# EAGLE board N_MD2 (EAGLE 9.6.2)
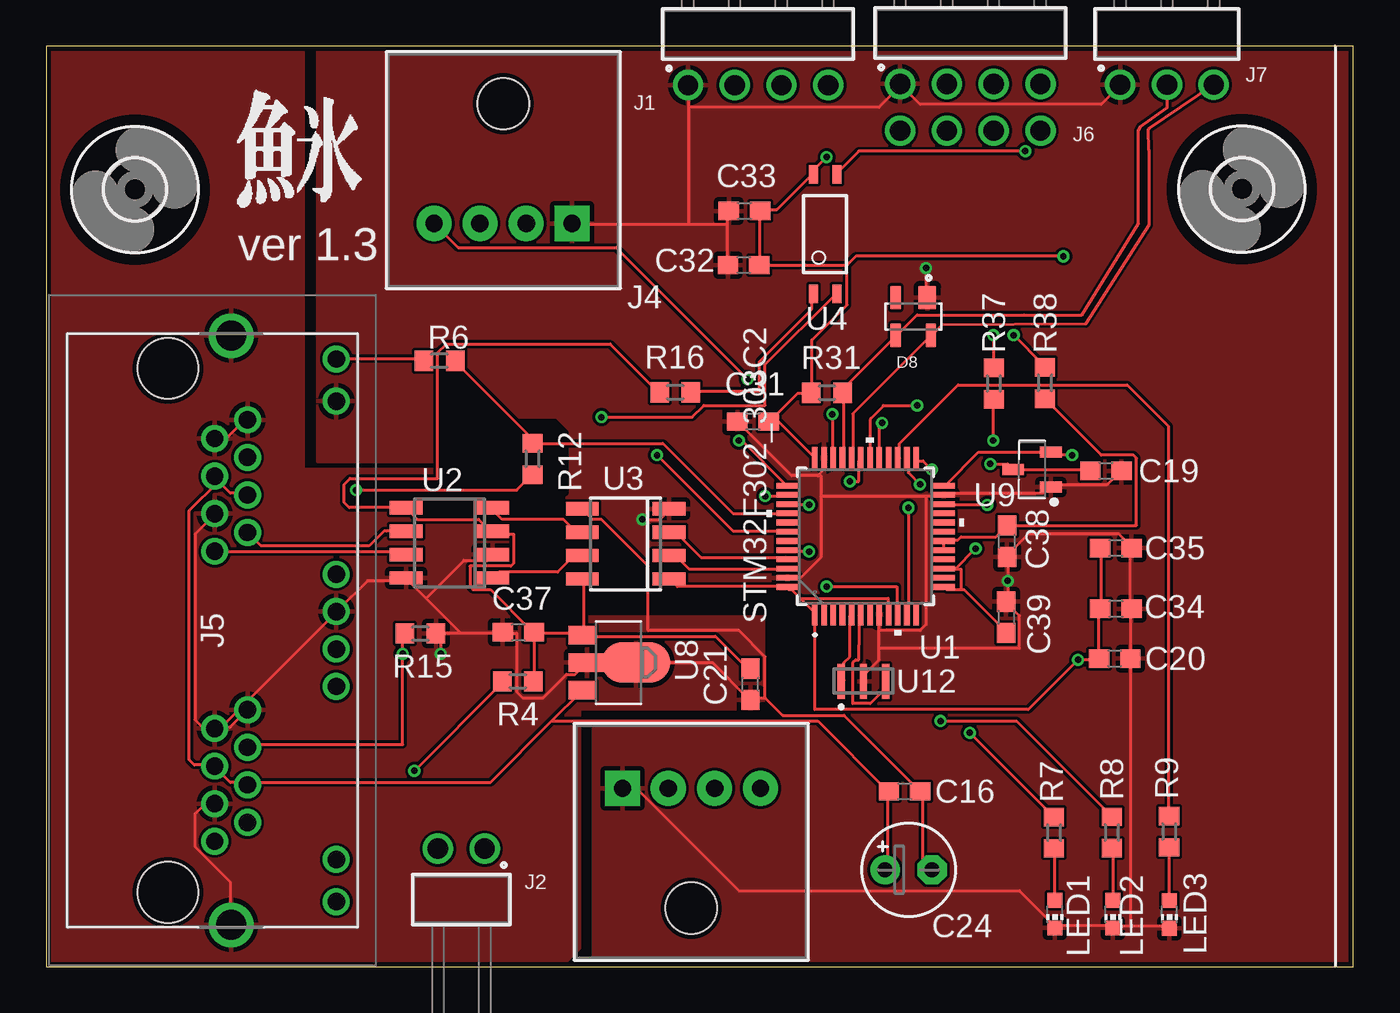
[diagram p0: board, top side]
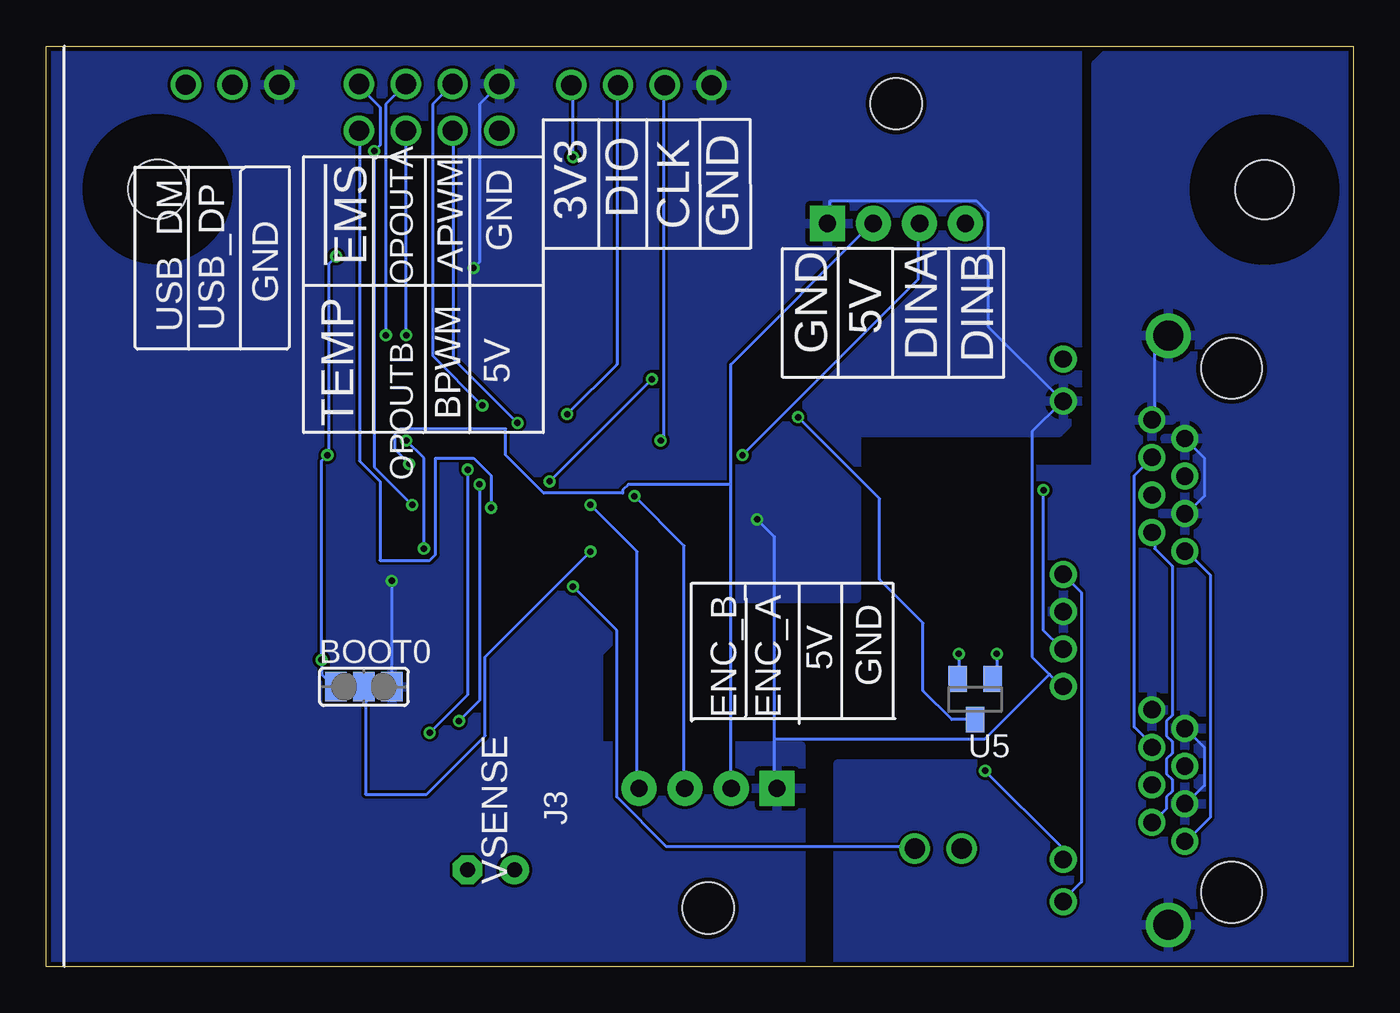
[diagram p1: board, bottom side, seen from below]

Size 71 x 50 mm. Coordinates in mm from the lower left corner, seen from the top.
Outline: 0,0 71,0 71,50 0,50 0,0
Copper layers (1*16): Top 0.035mm / dielectric 1.5mm / Bottom 0.035mm
Design rules "SeeedStudio_2layer_DRU_no_angle_20140221": minimum track width 6mil, minimum drill 12mil, track to track 6mil, track to pad 6mil, pad to pad 6mil, via to via 6mil, smd to smd 0mil, copper to edge 10mil, drill to drill 10mil, minimum pad ring 10mil, minimum via ring 6mil, stop-mask expansion 2mil, vias tented up to drill 100mil, thermal gap 10mil

## Footprints (pad centres in the part's own frame; a part is rotated, then mirrored left to right if it is on the bottom)
SJ_2 = smd 1.168 x 1.6: 1 -1.524,0; 2 0,0; 3 1.524,0
C0603 = smd 1.1 x 1: 1 -0.85,0; 2 0.85,0
E2,5-5 = drill 0.813 pad 1.6: + -1.27,0 | drill 0.813 pad 1.6 octagon: - 1.27,0
SOT143 = smd 0.99 x 1.3: 1 -0.76,-1.025 | smd 0.59 x 1.3: 2 0.96,-1.025; 3 0.96,1.025; 4 -0.96,1.025
3,2 = hole 3.2: 0,0
61300411021 = drill 1.1: 1 3.81,2.77; 2 1.27,2.77; 3 -1.27,2.77; 4 -3.81,2.77
61300211021 = drill 1.1: 1 1.27,2.77; 2 -1.27,2.77
CONN4_1744426-4 = drill 0.94 pad 1.905 square: 1 7.493,0 | drill 0.94 pad 1.905: 2 5.004,0; 3 2.489,0; 4 0,0 | hole 2.794: 3.759,6.502
RJHSE538102 = drill 0.94 pad 1.462: A1 0,0; A2 -1.02,1.78; A3 -2.04,0; A4 -3.06,1.78; A5 -4.08,0; A6 -5.1,1.78; A7 -6.12,0; A8 -7.14,1.78; A9 3.28,6.6; A10 1.25,6.6; A11 -8.15,6.6; A12 -10.44,6.6; B1 15.75,0; B2 14.73,1.78; B3 13.71,0; B4 12.69,1.78; B5 11.67,0; B6 10.65,1.78; B7 9.63,0; B8 8.61,1.78; B9 19.03,6.6; B10 16.74,6.6; B11 7.34,6.6; B12 5.31,6.6 | drill 1.62 pad 2.43: MH1 -11.705,0.89; MH2 20.295,0.89 | hole 3.3: -9.93,-2.54; 18.52,-2.54
61300821021 = drill 1.1: 1 3.81,2.77; 2 3.81,5.31; 3 1.27,2.77; 4 1.27,5.31; 5 -1.27,2.77; 6 -1.27,5.31; 7 -3.81,2.77; 8 -3.81,5.31
61300311021 = drill 1.1: 1 2.54,2.77; 2 0,2.77; 3 -2.54,2.77
CHIP-LED0603 = smd 0.8 x 0.8: A 0,-0.75; C 0,0.75
R0603 = smd 1 x 1.1: 1 -0.85,0; 2 0.85,0
LQFP48-7X7MM = smd 1.194 x 0.305: 1 -4.25,2.75; 2 -4.25,2.25; 3 -4.25,1.75; 4 -4.25,1.25; 5 -4.25,0.75; 6 -4.25,0.25; 7 -4.25,-0.25; 8 -4.25,-0.75; 9 -4.25,-1.25; 10 -4.25,-1.75; 11 -4.25,-2.25; 12 -4.25,-2.75; 25 4.25,-2.75; 26 4.25,-2.25; 27 4.25,-1.75; 28 4.25,-1.25; 29 4.25,-0.75; 30 4.25,-0.25; 31 4.25,0.25; 32 4.25,0.75; 33 4.25,1.25; 34 4.25,1.75; 35 4.25,2.25; 36 4.25,2.75 | smd 0.305 x 1.194: 13 -2.75,-4.25; 14 -2.25,-4.25; 15 -1.75,-4.25; 16 -1.25,-4.25; 17 -0.75,-4.25; 18 -0.25,-4.25; 19 0.25,-4.25; 20 0.75,-4.25; 21 1.25,-4.25; 22 1.75,-4.25; 23 2.25,-4.25; 24 2.75,-4.25; 37 2.75,4.25; 38 2.25,4.25; 39 1.75,4.25; 40 1.25,4.25; 41 0.75,4.25; 42 0.25,4.25; 43 -0.25,4.25; 44 -0.75,4.25; 45 -1.25,4.25; 46 -1.75,4.25; 47 -2.25,4.25; 48 -2.75,4.25
SO08 = smd 0.72 x 1.78: 1 -1.905,-2.35; 2 -0.635,-2.35; 3 0.635,-2.35; 4 1.905,-2.35; 5 1.905,2.35; 6 0.635,2.35; 7 -0.635,2.35; 8 -1.905,2.35
MINI-FLAT-4 = smd 1 x 0.5: 1 -3.24,0.635; 2 -3.24,-0.635; 3 3.24,-0.635; 4 3.24,0.635
SOT23 = smd 1 x 1.4: 1 -0.95,-1.1; 2 0.95,-1.1; 3 0,1.1
SOT89 = smd 1 x 1.5: 1 -1.499,-1.981; 3 1.499,-1.981 | smd 1 x 2: 2 0,-1.727 | smd 2.2 x 3.7: 2@1 0,0.94
SOT95P240X110-3 = smd 1.18 x 0.609: 1 -1.024,0.95; 2 -1.024,-0.95; 3 1.024,0
CSTNE_GH5L = smd 0.4 x 1.9: 1 -1.2,0; 2 0,0; 3 1.2,0

## Placement (x,y rotation side)
BOOT0  [SJ_2]  53.74,15.2 0 bottom
C16  100n  [C0603]  46.63,9.52 0 top
C19  1u  [C0603]  57.56,26.92 0 top
C20  1u  [C0603]  58.04,16.73 0 top
C21  100n  [C0603]  38.25,15.34 90 top
C24  47u  [E2,5-5]  46.84,5.26 0 top
C31  100n  [C0603]  38.39,29.61 0 top
C32  100n  [C0603]  37.88,38.1 0 top
C33  100n  [C0603]  37.93,41.04 0 top
C34  10n  [C0603]  58.1,19.43 180 top
C35  1u  [C0603]  58.1,22.73 180 top
C37  330n  [C0603]  25.65,18.16 180 top
C38  330p  [C0603]  52.18,23.1 90 top
C39  330p  [C0603]  52.13,18.98 270 top
D8  SP0503BAHTG  [SOT143]  47.1,35.31 180 top
H1  MOUNT-HOLE3.2  [3,2]  4.83,42.2 0 top
H2  MOUNT-HOLE3.2  [3,2]  64.94,42.23 0 top
J1  61300411021  [61300411021]  38.67,50.65 180 top
J2  61300211021  [61300211021]  22.55,3.64 0 top
J3  EP2.5-4-SIDE  [CONN4_1744426-4]  38.8,9.68 180 top
J4  EP2.5-4-SIDE  [CONN4_1744426-4]  21.07,40.37 0 top
J5  RJHSE-5381-02  [RJHSE538102]  9.16,22.56 270 top
J6  61300821021  [61300821021]  50.19,50.71 180 top
J7  61300311021  [61300311021]  60.87,50.67 180 top
LED1  RED  [CHIP-LED0603]  54.79,2.85 180 top
LED2  YELLOW  [CHIP-LED0603]  57.94,2.85 180 top
LED3  GREEN  [CHIP-LED0603]  61.01,2.84 180 top
R4  100  [R0603]  25.62,15.49 180 top
R6  180  [R0603]  21.37,32.91 0 top
R7  1.2k  [R0603]  54.74,7.28 90 top
R8  1.2k  [R0603]  57.88,7.28 90 top
R9  1.2k  [R0603]  60.99,7.33 90 top
R12  180  [R0603]  26.42,27.57 270 top
R15  10k  [R0603]  20.32,18.09 180 top
R16  470  [R0603]  34.17,31.19 0 top
R31  1k5  [R0603]  42.41,31.17 0 top
R37  1k  [R0603]  51.47,31.67 270 top
R38  1k  [R0603]  54.24,31.7 270 top
U1  STM32F302_303C2  [LQFP48-7X7MM]  44.5,23.37 90 top
U2  NCV7351D1E  [SO08]  21.9,23.01 90 top
U3  SI8621EC-B-IS  [SO08]  31.48,22.96 90 top
U4  TLP291  [MINI-FLAT-4]  42.31,39.79 90 top
U5  BSS138BK  [SOT23]  20.55,14.52 180 bottom
U8  78L05F  [SOT89]  31.1,16.51 270 top
U9  XC6206  [SOT95P240X110-3]  53.54,26.99 180 top
U12  CSTNE_GH5L  [CSTNE_GH5L]  44.39,15.48 0 top

## Library data of the parts
BOOT0 = jumper
C16 C19-C21 C24 C31-C35 C37-C39 = rcl; SPICEPREFIX: C
D8 = Littelfuse; DESCRIPTION: 8.5V Clamp Ipp Tvs Diode Surface Mount SOT-143-4; DIGI-KEY_PART_NUMBER: F2715CT-ND; DIGI-KEY_PURCHASE_URL: https://www.digikey.com/product-detail/en/littelfuse-inc/SP0503BAHTG/F2715CT-ND/1154322?utm_source=snapeda&utm_medium=aggregator&utm_campaign=symbol; MF: Littelfuse Inc.; MP: SP0503BAHTG; PACKAGE: SOT-143 Littelfuse
H1 H2 = holes
J1 = Wurth_Connectors_WR-PHD; DATASHEET-URL: https://www.we-online.com/catalog/datasheet/61300411021.pdf; GENDER: Pin Header; IR: 3A; MOUNT: THT; PACKAGING: Bag; PART-NUMBER: 61300411021; PINS: 4; PITCH: 2.54mm; ROWS: Single; TYPE: Angled
J2 = Wurth_Connectors_WR-PHD; DATASHEET-URL: https://www.we-online.com/catalog/datasheet/61300211021.pdf; GENDER: Pin Header; IR: 3A; MOUNT: THT; PACKAGING: Bag; PART-NUMBER: 61300211021; PINS: 2; PITCH: 2.54mm; ROWS: Single; TYPE: Angled
J3 J4 = con-ep2.5; MANUFACTURER_PART_NUMBER: 17444264; VENDOR: TE Connectivity
J5 = con-rj45; DESCRIPTION: Modular Connectors / Ethernet Connectors R/A RJ45 SHEILDED 2 PORT Y/G LEDS; HEIGHT: 13.46mm; MANUFACTURER_NAME: Amphenol; MANUFACTURER_PART_NUMBER: RJHSE-5381-02; MOUSER_PART_NUMBER: 523-RJHSE-5381-02; MOUSER_PRICE-STOCK: https://www.mouser.com/Search/Refine.aspx?Keyword=523-RJHSE-5381-02
J6 = Wurth_Connectors_WR-PHD; DATASHEET-URL: https://www.we-online.com/catalog/datasheet/61300821021.pdf; GENDER: Pin Header; IR: 3A; MOUNT: THT; PACKAGING: Bag; PART-NUMBER: 61300821021; PINS: 8; PITCH: 2.54mm; ROWS: Dual; TYPE: Angled
J7 = Wurth_Connectors_WR-PHD; DATASHEET-URL: https://www.we-online.com/catalog/datasheet/61300311021.pdf; GENDER: Pin Header; IR: 3A; MOUNT: THT; PACKAGING: Bag; PART-NUMBER: 61300311021; PINS: 3; PITCH: 2.54mm; ROWS: Single; TYPE: Angled
LED1-LED3 = led
R4 R6-R9 R12 R15 R16 R31 R37 R38 = rcl; SPICEPREFIX: R
U1 = stm32_mcu; COPYRIGHT: Copyright (C) 2016 Accelerated Designs. All rights reserved; MANUFACTURER_PART_NUMBER: STM32F302_303C2; VENDOR: STMicroelectronics
U2 = on-semi
U3 = silicon-labs
U4 = toshiba; OC_FARNELL: unknown; OC_NEWARK: unknown
U5 = nexperia; MPN: BSS138BK,215
U8 = linear
U9 = torex
U12 = resonator; DESCRIPTION: Resonators 8.0000MHz 33pF SMD CHP Resntr Tol 0.07%; HEIGHT: 1mm; MANUFACTURER_NAME: Murata Electronics; MANUFACTURER_PART_NUMBER: CSTNE8M00GH5L000R0; MOUSER_PART_NUMBER: 81-CSTNE8M00GH5L000R; MOUSER_PRICE-STOCK: https://www.mouser.com/Search/Refine.aspx?Keyword=81-CSTNE8M00GH5L000R

## Nets
5V: J6.2
5V_ISO: C21.2 C37.1 R4.1 R16.1 U2.3 U2.5 U3.8 U8.1
!EMS: J6.7 U1.22 U4.3
+3V3: BOOT0.1 C20.1 C31.2 C32.2 C33.2 C34.2 C35.2 J1.4 R31.1 U1.1 U1.9 U1.24 U1.36 U1.48 U3.1 U4.4 U9.2
+5V: C19.1 J3.2 J4.2 U9.3
APWM: J6.3 U1.30
BOOT0: BOOT0.2 U1.44
BPWM: J6.4 U1.29
CAN_H: J5.A1 J5.B1 U2.7
CAN_L: J5.A2 J5.B2 U2.6
CAN_RX: U1.45 U3.3
CAN_TX: U1.46 U3.2
DIN_A: J4.3 U1.42
DIN_B: J4.4 U1.31
ENC_A: J3.3 U1.38
ENC_B: J3.4 U1.39
GNDA: BOOT0.3 C19.2 C20.2 C31.1 C32.1 C33.1 C34.1 C35.1 C38.1 C39.1 D8.1 J1.1 J3.1 J4.1 J5.A11 J5.B11 J6.1 J7.1 LED1.C LED2.C LED3.C U1.8 U1.23 U1.35 U1.47 U3.4 U9.1 U12.2
GNDIO: C16.2 C21.1 C24.- C37.2 J5.A3 J5.A7 J5.A8 J5.A9 J5.B3 J5.B7 J5.B8 J5.MH1 J5.MH2 R15.1 U2.2 U2.8 U3.5 U5.2 U8.2 U8.2@1
ISENSEA: C38.2 R38.2 U1.17 U1.18
ISENSEB: C39.2 R37.2 U1.13 U1.15
LED_CAN: R6.2 R12.1 U1.40
LED_GREEN: R7.2 U1.25
LED_RED: R9.2 U1.27
LED_YELLOW: R8.2 U1.26
N$6: J5.B10 R4.2
N$7: J5.A10 J5.B9
N$9: LED1.A R7.1
N$10: LED2.A R8.1
N$11: LED3.A R9.1
N$12: J5.A12 R6.1
N$13: J5.B12 R12.2
N$14: U2.1 U3.7
N$15: C16.1 C24.+ J5.A4 J5.A5 J5.B4 J5.B5 U8.3
N$16: U2.4 U3.6
N$17: J5.A6 J5.B6 R15.2 U5.1
N$24: U4.2 U5.3
N$25: R16.2 U4.1
N$34: U1.5 U12.1
N$35: U1.6 U12.3
OPOUTA: J6.5 R38.1
OPOUTB: J6.6 R37.1
SWCLK: J1.2 U1.37
SWDIO: J1.3 U1.34
TEMP: J6.8 U1.11
USB_DM: D8.4 J7.3 U1.32
USB_DP: D8.3 J7.2 R31.2 U1.33
VSENSE: J2.1 U1.10

## Tracks (layer width: path | path; a pad name or v marks a point on that pad's centre or on a via)
5V_ISO
  Top 0.152: 26.51,18.1 26.51,15.56 R4.1 | C21.2 38.1,16.19 36.35,17.94 29.21,17.94 U8.1 | U3.8 29.21,20.95 29.21,18.1 U8.1 | 26.51,18.1 29.05,18.1 U8.1 | 26.51,18.1 C37.1 26.35,18.26 24.13,20.48 23.18,20.48 23.02,20.64 23.02,21.75 25.24,21.75 25.4,21.91 25.4,23.5 24.29,23.5 U2.3 24.13,23.65 23.5,24.29 20.16,24.29 19.68,24.77 U2.5 19.53,24.92 16.47,24.92 16.19,25.2 16.19,26.19 16.51,26.51 21.27,26.51 21.27,33.34 21.75,33.81 30.64,33.81 33.18,31.27 R16.1
!EMS  (via drill 0.35)
  Top 0.152: v53.18,44.29 44.13,44.29 43.02,43.18 U4.3 | v51.12,25.08 48.9,25.08 U1.22
  Bottom 0.152: J6.7 53.98,47.78 52.86,46.67 52.86,44.61 v53.18,44.29 53.18,27.15 v51.12,25.08
+3V3  (via drill 0.35)
  Top 0.152: 39.53,29.84 40.8,31.11 41.43,31.11 R31.1 41.59,31.27 41.59,34.04 43.5,35.94 43.5,38.1 | 39.53,29.84 39.37,29.69 C31.2 39.53,29.84 | 39.53,29.84 U1.36 | C32.2 38.73,40.96 C33.2 38.89,41.12 39.69,41.12 41.59,43.02 U4.4 41.59,43.18 v42.39,43.97 | C32.2 43.5,38.1 | C32.2 | 40.96,20 40.48,20.48 40.32,20.48 U1.48 40.16,20.64 34.29,20.64 33.97,20.95 U3.1 | 40.96,20 41.75,19.21 U1.1 41.75,19.05 41.75,13.97 53.34,13.97 v56.04,16.67 57.15,16.67 C20.1 57.15,16.83 57.15,19.37 C34.2 57.31,19.53 57.31,22.7 C35.2 | 40.96,20 45.72,20 45.72,19.21 U1.9 | U1.24 48.9,26.19 50.64,27.94 54.45,27.94 U9.2 54.61,27.94 54.77,27.78 v55.72,27.78 | 43.5,38.1 43.97,38.58 v55.24,38.58
  Bottom 0.152: v42.39,43.97 42.39,47.78 J1.4 | BOOT0.1 55.4,15.24 56.04,15.88 v56.04,16.67 56.04,27.46 v55.72,27.78 55.66,27.85 55.66,38.17 v55.24,38.58
+5V  (via drill 0.35)
  Top 0.152: C19.1 56.67,26.99 52.55,26.99 U9.3 52.39,27.15 52.23,27.3 v51.28,27.3
  Bottom 0.152: v51.28,27.3 52.07,28.1 52.07,28.89 51.75,29.21 46.04,29.21 46.04,27.78 43.97,25.72 39.69,25.72 39.69,25.88 39.37,26.19 33.81,26.19 | 33.81,26.19 33.81,9.68 J3.2 | 33.81,26.19 33.81,32.7 26.19,40.32 J4.2
APWM  (via drill 0.35)
  Top 0.152: v47.31,30.48 45.47,30.48 45.47,30.45 44.8,29.78 44.8,29.74 44.77,29.71 44.77,27.62 U1.30
  Bottom 0.152: v47.31,30.48 50.01,33.18 50.01,46.83 49.05,47.78 J6.3
BOOT0  (via drill 0.35)
  Top 0.152: v41.43,22.54 40.32,22.54 U1.44
  Bottom 0.152: v41.43,22.54 47.15,16.83 47.15,12.54 50.32,9.37 53.66,9.37 53.66,15.08 BOOT0.2
BPWM  (via drill 0.35)
  Top 0.152: v45.4,29.53 45.24,29.53 U1.29
  Bottom 0.152: v45.4,29.53 48.9,33.02 48.9,45.24 J6.4
CAN_H
  Top 0.152: U2.7 19.53,22.38 19.37,22.54 9.21,22.54 J5.A1
  Bottom 0.152: J5.B1 9.05,6.83 7.78,8.1 7.78,21.27 9.05,22.54 J5.A1
CAN_L
  Top 0.152: U2.6 19.53,23.65 18.49,23.65 18.35,23.65 17.54,22.85 11.67,22.85 J5.A2
  Bottom 0.152: J5.B2 10.79,7.94 10.16,8.57 10.16,9.21 9.84,9.53 9.84,10.16 10.16,10.48 10.16,11.27 9.84,11.59 9.84,12.22 10.16,12.54 10.16,13.34 9.84,13.65 9.84,21.75 10.79,22.7 10.79,23.5 J5.A2
CAN_RX
  Top 0.152: U1.45 40.16,22.23 35.56,22.23 34.29,23.5 33.97,23.5 U3.3
CAN_TX
  Top 0.152: U1.46 40.16,21.59 34.92,21.59 34.29,22.23 33.97,22.23 U3.2
DIN_A  (via drill 0.35)
  Top 0.152: v33.18,27.78 37.31,23.65 40.16,23.65 U1.42
  Bottom 0.152: v33.18,27.78 23.65,37.31 23.65,40.32 J4.3
DIN_B  (via drill 0.35)
  Top 0.152: v43.66,26.35 44.13,26.35 44.13,27.46 U1.31 | v38.1,31.91 30.96,39.05 22.38,39.05 21.11,40.32 J4.4
  Bottom 0.152: v38.1,31.91 v43.66,26.35
ENC_A  (via drill 0.35)
  Top 0.152: v39.05,25.56 40.16,25.56 U1.38
  Bottom 0.152: v39.05,25.56 36.35,22.86 36.35,9.68 J3.3
ENC_B  (via drill 0.35)
  Top 0.152: v41.43,25.08 40.32,25.08 U1.39
  Bottom 0.152: v41.43,25.08 38.89,22.54 38.89,9.68 J3.4
GNDA  (via drill 0.35)
  Top 0.152: 58.9,2.22 57.94,2.22 LED2.C 57.78,2.22 54.93,2.22 LED1.C 54.77,2.22 52.86,4.13 37.62,4.13 32.23,9.53 31.43,9.53 J3.1 | 58.9,2.22 60.96,2.22 LED3.C | 58.9,2.22 58.9,16.67 C20.2 58.9,16.83 58.9,19.37 C34.1 58.9,19.53 58.9,22.7 C35.1 58.9,22.86 58.26,23.5 53.34,23.5 52.23,22.38 C38.1 52.23,22.23 v52.23,20.95 52.23,19.84 C39.1 52.23,19.68 52.86,19.05 52.86,17.3 45.24,17.3 | 45.24,17.3 45.24,16.67 44.45,15.88 44.45,15.56 U12.2 | 45.24,17.3 45.24,18.26 | 45.24,18.26 45.24,19.05 U1.8 | C19.2 58.26,26.83 57.63,26.19 54.61,26.19 U9.1 54.45,26.04 54.13,25.72 48.9,25.72 U1.23 48.74,25.56 47.78,25.56 | 41.91,26.67 40.48,26.67 37.62,29.53 C31.1 | 41.91,26.67 42.23,26.99 42.23,27.46 U1.35 | 42.07,25.56 42.07,26.67 41.91,26.67 | 42.07,25.56 42.07,22.23 40.96,21.11 40.32,21.11 U1.47 | 42.07,25.56 47.78,25.56 | 45.24,18.26 47.47,18.26 47.78,18.57 47.78,25.56 | v32.38,24.29 33.34,24.29 33.81,24.77 U3.4 | 36.99,40.32 36.99,40.96 C33.1 | 36.99,40.32 36.99,38.1 C32.1 | 34.92,40.32 28.57,40.32 J4.1 | 34.92,40.32 36.99,40.32 | 34.92,40.32 34.92,46.67 | 34.92,46.67 34.92,47.78 J1.1 | v47.78,37.94 47.78,36.35 D8.1 | J7.1 58.26,47.78 57.31,46.83 47.47,46.83 46.51,47.78 J6.1 46.35,47.78 45.24,46.67 34.92,46.67
  Bottom 0.152: v52.23,20.95 52.23,15.24 BOOT0.3 | 16.51,15.88 17.46,16.83 17.46,29.05 15.88,30.64 J5.A11 15.88,30.8 19.84,34.77 19.84,40.96 20.48,41.59 28.42,41.59 28.42,40.48 J4.1 | 16.51,15.88 15.88,15.24 J5.B11 | v32.38,24.29 31.43,23.34 31.43,12.38 | 31.43,12.38 31.43,9.68 J3.1 | 16.51,15.88 20,12.38 31.43,12.38 | v47.78,37.94 47.47,38.26 47.47,46.83 46.51,47.78 J6.1
  pour Bottom: 31,0 71,0 71,50 15,50 15,30 16,29 27,29 27,20 38,20 41,17 41,12 30,12 30,0
  pour Top: 14.73,50.04 14.73,27.43 21.34,27.43 23.75,29.84 27.69,29.84 28.45,29.08 28.45,25.65 28.19,25.4 26.8,25.4 26.8,19.94 27.05,19.68 27.3,19.43 39.5,19.43 39.88,19.05 39.88,13.46 39.37,12.95 29.72,12.95 29.72,0 71.12,0 71.12,50.04
GNDIO  (via drill 0.35)
  Top 0.152: C24.- 48.1,5.4 47.62,5.4 47.62,9.37 C16.2 47.47,9.53 43.34,13.65 40.01,13.65 39.05,14.61 | 39.05,14.61 39.05,16.83 37.62,18.26 32.7,18.26 32.7,21.75 30.16,24.29 29.69,24.29 29.21,24.77 U3.5 | 39.05,14.61 38.26,14.61 C21.1 38.1,14.61 36.2,16.51 U8.2@1 U8.2 28.73,15.88 28.26,15.88 26.99,14.61 25.88,14.61 25.56,14.92 25.56,18.1 24.92,18.1 C37.2 24.77,18.1 22.54,18.1 | J5.A8 10.79,29.69 9.84,28.73 9.21,28.73 J5.A7 | 22.54,18.1 21.27,18.1 R15.1 21.27,17.94 21.43,17.94 v21.43,16.99 | 22.54,18.1 20.64,20 | 20.64,20 19.68,20.95 U2.8 19.53,20.95 17.46,20.95 15.88,19.37 J5.A9 15.72,19.21 9.53,13.02 | 20.64,20 22.7,22.07 23.97,22.07 24.13,22.23 U2.2 | 9.53,13.02 9.21,13.02 J5.B7 | 9.53,13.02 10,13.02 10.79,13.81 J5.B8 | J5.MH2 10,2.38 10,4.6 8.89,5.71 8.1,6.51 8.1,8.3 8.53,8.73 9.05,8.73 J5.B3 | 9.53,13.02 J5.B7 | J5.A3 9.05,24.45 8.1,23.5 8.1,13.41 8.1,13.4 8.48,13.02 9.05,13.02 J5.B7
  Bottom 0.152: J5.A3 9.05,24.61 8.1,25.56 8.1,27.62 9.05,28.57 J5.A7 | J5.MH1 10.16,34.13 10.79,33.5 10.79,29.84 J5.A8 | v21.43,16.99 21.43,15.72 U5.2 | J5.B3 9.05,8.89 8.1,9.84 8.1,11.91 9.05,12.86 J5.B7
  pour Bottom: 0,50 13,50 14,49 14,27 24,27 24,20 18,20 18,12 19,11 28,11 28,0 0,0
  pour Top: 0,50 0,0 28,0 29,1 29,14 39,14 39,19 26,19 26,29 24,27 14,27 14,50
ISENSEA
  Top 0.152: R38.2 54.29,30.8 57.31,27.78 59.05,27.78 59.21,27.62 59.21,23.97 52.23,23.97 C38.2 52.07,23.81 51.59,23.34 49.69,23.34 49.53,23.18 48.9,23.18 U1.18 48.74,23.02 48.74,22.7 U1.17
ISENSEB  (via drill 0.35)
  Top 0.152: 49.69,20.48 48.9,20.48 U1.13 | 49.69,20.48 49.85,20.48 52.07,18.26 C39.2 | v51.44,28.57 51.44,30.8 R37.2 | 49.37,21.59 v50.48,22.7 | 49.37,21.59 48.9,21.59 U1.15 | 49.69,20.48 49.69,21.59 49.37,21.59
  Bottom 0.152: v51.44,28.57 50.48,27.62 v50.48,22.7
LED_CAN
  Top 0.152: R6.2 22.23,32.86 26.51,28.57 R12.1 26.51,28.42 33.5,28.42 37.31,24.61 40.16,24.61 U1.40
LED_GREEN  (via drill 0.35)
  Top 0.152: v50.16,12.7 54.61,8.26 R7.2 | v48.1,26.99 47.62,27.46 47.31,27.46 U1.25
  Bottom 0.152: v50.16,12.7 48.1,14.76 v48.1,26.99
LED_RED
  Top 0.152: R9.2 60.96,8.26 60.96,29.34 58.71,31.59 49.53,31.59 46.35,28.42 46.35,27.62 U1.27
LED_YELLOW  (via drill 0.35)
  Top 0.152: v48.58,13.34 52.7,13.34 57.78,8.26 R8.2 | v47.47,26.19 46.83,26.83 46.83,27.46 U1.26
  Bottom 0.152: v48.58,13.34 47.47,14.45 v47.47,26.19
N$6  (via drill 0.35)
  Top 0.152: v20,10.64 24.77,15.4 R4.2
  Bottom 0.152: v20,10.64 15.88,6.51 15.88,5.87 J5.B10
N$7
  Bottom 0.152: J5.B9 15.72,3.65 14.76,4.6 14.76,20.32 15.72,21.27 J5.A10
N$9
  Top 0.152: LED1.A 54.77,3.65 54.77,6.35 R7.1
N$10
  Top 0.152: LED2.A 57.94,3.65 57.94,6.35 R8.1
N$11
  Top 0.152: LED3.A 60.96,3.65 60.96,6.35 R9.1
N$12
  Top 0.152: R6.1 20.48,33.02 15.88,33.02 J5.A12
N$13  (via drill 0.35)
  Top 0.152: v16.83,25.88 25.56,25.88 26.35,26.67 R12.2
  Bottom 0.152: v16.83,25.88 16.83,18.26 15.88,17.3 J5.B12
N$14
  Top 0.152: U2.1 24.29,21.11 24.61,21.43 27.78,21.43 28.57,22.23 29.05,22.23 U3.7
N$15
  Top 0.152: C24.+ 45.72,5.4 45.72,9.37 C16.1 45.72,9.53 41.91,13.34 27.46,13.34 | 9.37,26.35 10,25.72 10.79,25.72 J5.A4 | 9.37,26.35 9.21,26.51 J5.A5 9.37,26.35 | 27.46,13.34 24.13,10 10.95,10 J5.B4 10.79,10 10,10 9.21,10.79 J5.B5 9.05,10.95 8.06,10.95 7.78,11.23 7.78,24.77 9.37,26.35 | 27.46,13.34 29.05,14.92 U8.3
N$16
  Top 0.152: U2.4 24.29,24.77 24.77,24.29 28.1,24.29 28.73,23.65 29.05,23.65 U3.6
N$17  (via drill 0.35)
  Top 0.152: R15.2 19.37,17.94 v19.37,16.99 19.37,12.06 10.95,12.06 J5.B6
  Bottom 0.152: v19.37,16.99 19.37,15.88 19.53,15.72 U5.1 | J5.A6 10.95,27.62 11.91,26.67 11.91,13.02 10.95,12.06 J5.B6
N$24  (via drill 0.35)
  Top 0.152: v30.16,29.84 35.08,29.84 35.72,30.48 39.05,30.48 39.05,32.7 42.86,36.51 U4.2
  Bottom 0.152: U5.3 21.82,13.42 23.37,14.98 23.37,18.66 25.73,21.03 25.73,25.41 v30.16,29.84
N$25
  Top 0.152: U4.1 41.59,36.51 41.59,35.72 38.73,32.86 38.73,31.27 35.08,31.27 R16.2
N$34
  Top 0.152: U1.5 43.66,19.05 43.66,16.83 43.34,16.51 43.34,15.56 U12.1
N$35
  Top 0.152: U1.6 44.13,19.05 44.13,17.47 44.13,16.67 43.97,16.67 43.81,16.51 43.81,14.29 44.77,14.29 45.56,15.08 45.56,15.4 U12.3
OPOUTA  (via drill 0.35)
  Top 0.152: v52.55,34.29 54.13,32.7 R38.1
  Bottom 0.152: J6.5 51.59,47.78 52.55,46.83 v52.55,34.29
OPOUTB  (via drill 0.35)
  Top 0.152: v51.44,34.29 51.44,32.54 R37.1
  Bottom 0.152: J6.6 51.46,34.32 v51.44,34.29
SWCLK  (via drill 0.35)
  Top 0.152: v37.62,28.57 37.78,28.57 40.16,26.19 U1.37
  Bottom 0.152: v37.62,28.57 37.47,28.73 37.47,47.78 J1.2
SWDIO  (via drill 0.35)
  Top 0.152: v42.7,30 42.7,27.62 U1.34
  Bottom 0.152: v42.7,30 40.01,32.7 40.01,47.78 J1.3
TEMP  (via drill 0.35)
  Top 0.152: v46.83,24.92 46.83,19.21 U1.11
  Bottom 0.152: v46.83,24.92 46.83,26.67 47.78,27.62 49.85,27.62 49.85,22.38 50.16,22.07 52.86,22.07 52.86,26.35 53.98,27.46 53.98,45.24 J6.8
USB_DM
  Top 0.152: U1.32 43.81,27.62 43.81,30.03 48.06,34.28 D8.4 48.1,34.29 48.69,34.88 56.48,34.91 59.88,40.28 59.88,44.37 59.86,45.45 59.89,45.5 J7.3
USB_DP
  Top 0.152: U1.33 43.34,27.62 43.34,31.11 R31.2 43.18,31.27 46.04,34.13 D8.3 46.2,34.29 47.3,35.4 53.1,35.4 | J7.2 60.86,47.88 60.88,46.65 59.4,45.59 59.39,45.56 59.31,45.44 59.32,40.34 56.24,35.4 54,35.4 | 53.1,35.4 54,35.4 | 53.1,35.4 54,35.4
VSENSE  (via drill 0.35)
  Top 0.152: v42.39,20.64 46.2,20.64 46.2,19.21 U1.10
  Bottom 0.152: v42.39,20.64 40.01,18.26 40.01,9.21 37.31,6.51 23.97,6.51 J2.1

## Text on the board
tPlace: ver 1.3
bPlace: GND | CLK | DIO | 3V3 | OPOUTA | APWM | !EMS | GND | USB_DP | USB_DM | GND | BPWM | TEMP | 5V | 5V | OPOUTB | DINB | DINA | GND | GND | ENC_A | ENC_B | 5V | VSENSE